# Altium PCB БНРД.xxxxxx.xxx.PcbDoc
Units mm, origin at the board's own origin, x right, y up, seen from the top; angles counter-clockwise.
Board outline 230.5 x 108.5 mm, 2 copper layers (Top Layer, Bottom Layer), stack 1.57 mm thick; 70 components, 62 nets, 225 pads, 0 vias.
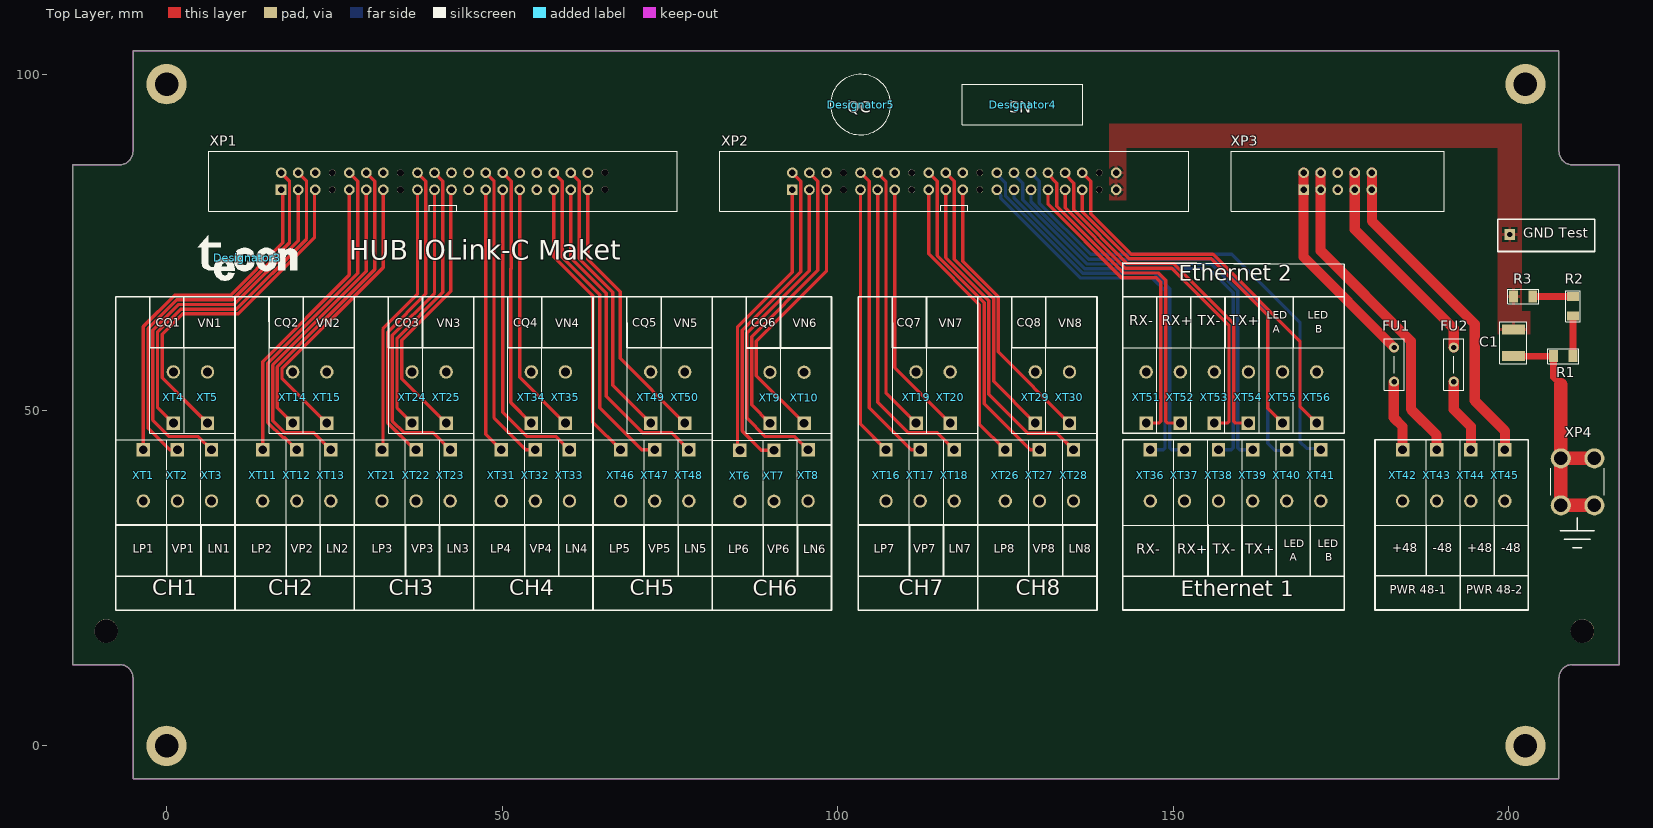
[diagram p0: Top Layer view]
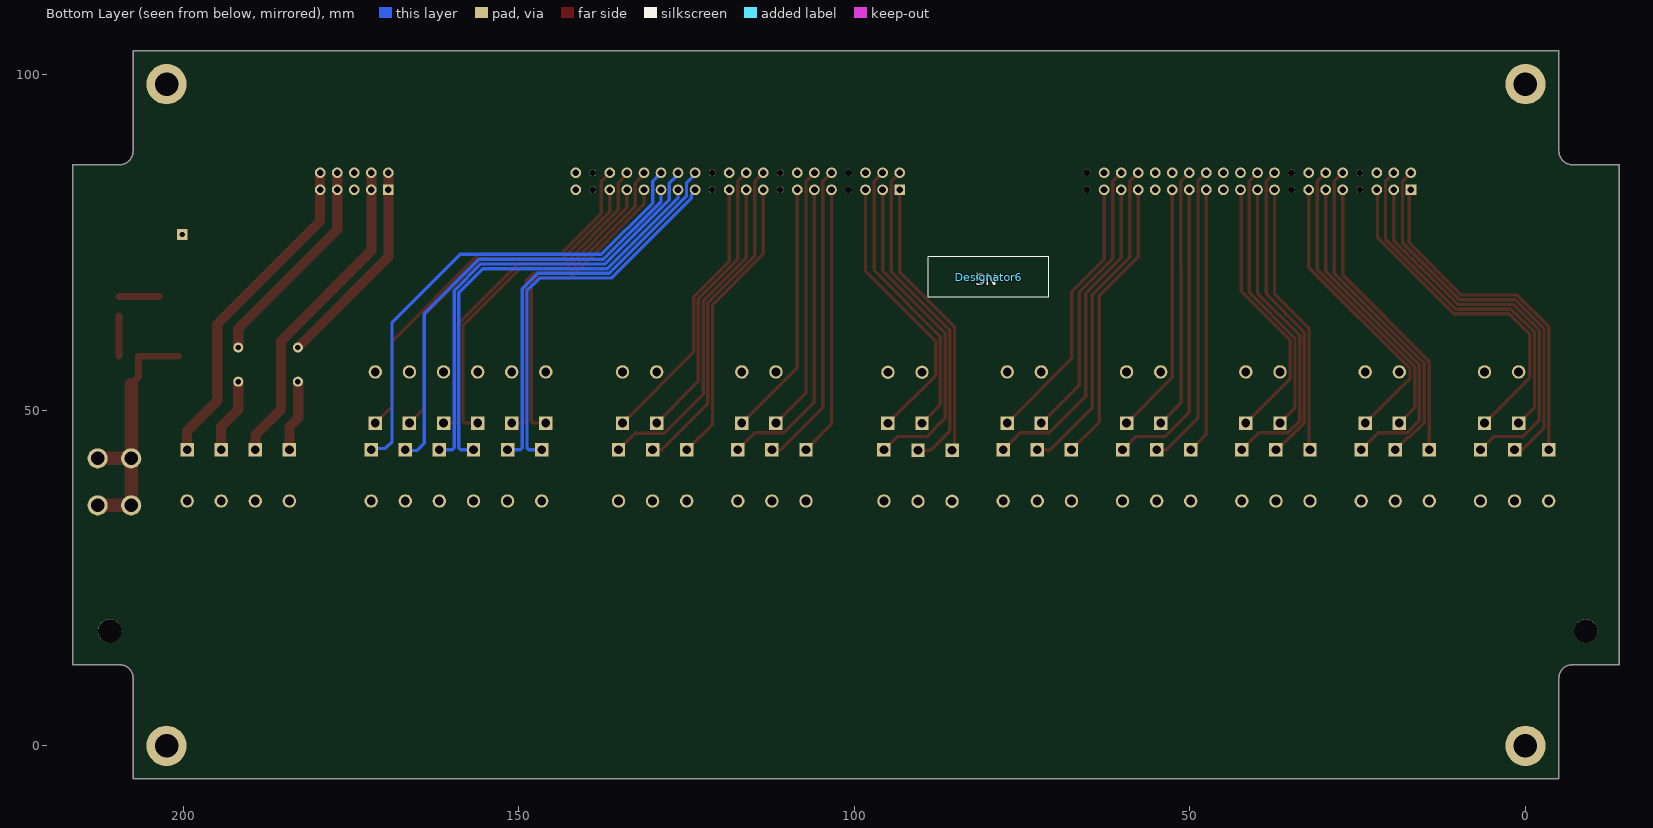
[diagram p1: Bottom Layer view, seen from below]
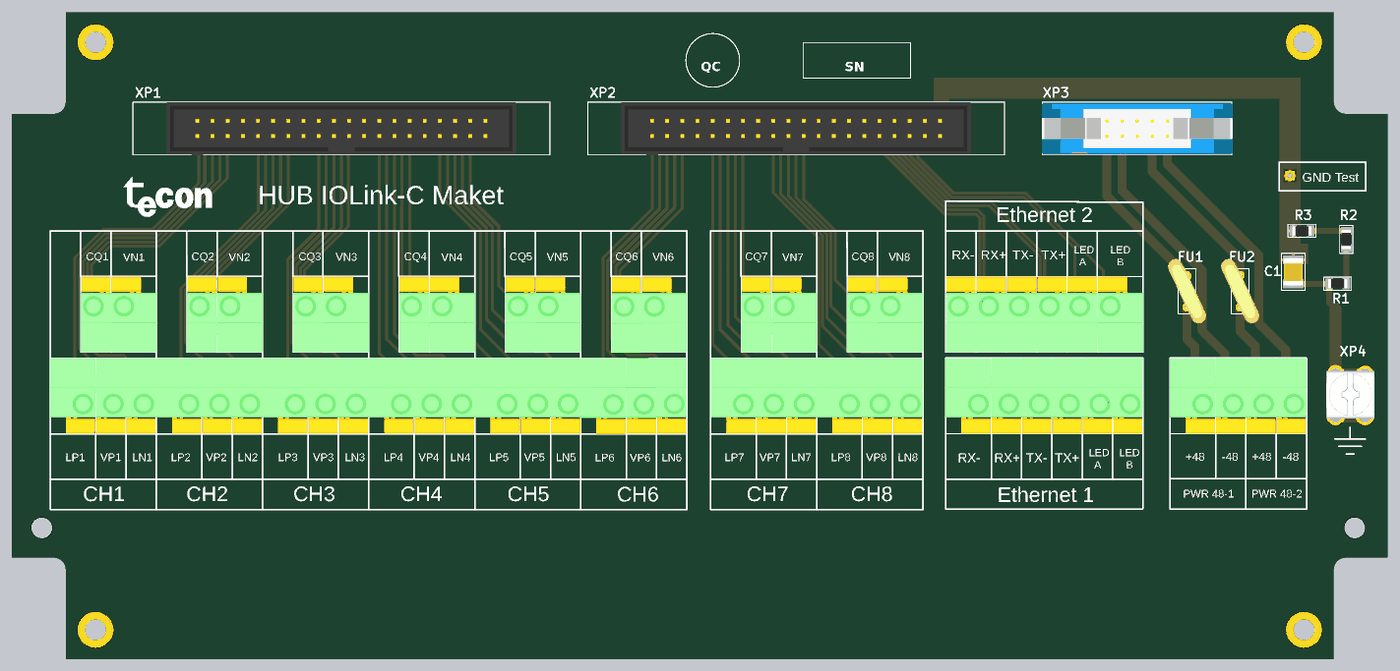
[diagram p2: 3D render of the assembled board from above, using the file's embedded part models]

## Layer stack, top to bottom
Top Solder: solder mask 0.015, Solder Resist, Dk 3.5
Top Layer: signal copper 0.018
Dielectric 1: dielectric 1.534, FR-4, Dk 4.8
Bottom Layer: signal copper 0.018
Bottom Solder: solder mask 0.015, Solder Resist, Dk 3.5

## Board outline
-5,-4.9 -5,10.1 ccw(c-7,10.1) -7,12.1 -14,12.1 -14,86.6 -7,86.6 ccw(c-7,88.6) -5,88.6 -5,103.6 207.5,103.6 207.5,88.6 ccw(c209.5,88.6) 209.5,86.6 216.5,86.6 216.5,12.1 209.5,12.1 ccw(c209.5,10.1) 207.5,10.1 207.5,-4.9

## Design rules (kind name [scope] priority, off if disabled: settings)
Clearance PWR2 [InNetClass('48V_2') vs InNetClass('48V_1')Or InNetClass('Ground')] p1: gap=2.5 ignorepadtopadclearanceinfootprint=FALSE except(0: Arc-Hole Track-Hole SMDPad-Hole THPad-Hole Via-Hole Fill-Hole Poly-Hole Region-Hole Text-Hole)
Clearance PWR1 [InNetClass('48V_1') vs InNetClass('48V_2')Or InNetClass('Ground')] p2: gap=2.5 ignorepadtopadclearanceinfootprint=FALSE except(0: Arc-Hole Track-Hole SMDPad-Hole THPad-Hole Via-Hole Fill-Hole Poly-Hole Region-Hole Text-Hole)
Clearance GND_1/3 [InNet('GND') vs InNet('NetR2_2')] p3: gap=0.84 ignorepadtopadclearanceinfootprint=FALSE except(0: Arc-Hole Track-Hole SMDPad-Hole THPad-Hole Via-Hole Fill-Hole Poly-Hole Region-Hole Text-Hole)
Clearance GND_ETH [InNetClass('Ground') vs InNetClass('ETH2')] p4: gap=2.5 ignorepadtopadclearanceinfootprint=FALSE except(0: Arc-Hole Track-Hole SMDPad-Hole THPad-Hole Via-Hole Fill-Hole Poly-Hole Region-Hole Text-Hole)
Clearance GND_GNDZ [InNet('GND') vs InNet('GNDZ')] p5: gap=2.5 ignorepadtopadclearanceinfootprint=FALSE except(0: Arc-Hole Track-Hole SMDPad-Hole THPad-Hole Via-Hole Fill-Hole Poly-Hole Region-Hole Text-Hole)
Clearance "Clearance PWR" [InNetClass('48V_1')OR InNetClass('48V_2') vs (InNetClass('ETH1') OR InNetClass('ETH2'))] p6: gap=2.5 ignorepadtopadclearanceinfootprint=FALSE except(0: Arc-Hole Track-Hole SMDPad-Hole THPad-Hole Via-Hole Fill-Hole Poly-Hole Region-Hole Text-Hole)
Clearance IsKeepOut [IsKeepOut] p7: gap=0.5 ignorepadtopadclearanceinfootprint=FALSE except(0: Arc-Hole Track-Hole SMDPad-Hole THPad-Hole Via-Hole Fill-Hole Poly-Hole Region-Hole Text-Hole)
Clearance "Clearance CH1" [InNetClass('CH1') vs (InNetClass('CH2') OR InNetClass('CH3') OR InNetClass('CH4') OR InNetClass('CH5') OR InNetClass('CH6') OR InNetClass('CH7') OR InNetClass('CH8') OR InNetClass('ETH1') OR InNetClass('ETH2'))] p8: gap=2.5 ignorepadtopadclearanceinfootprint=FALSE except(0: Arc-Hole Track-Hole SMDPad-Hole THPad-Hole Via-Hole Fill-Hole Poly-Hole Region-Hole Text-Hole)
Clearance "Clearance CH2" [InNetClass('CH2') vs (InNetClass('CH1') OR InNetClass('CH3') OR InNetClass('CH4') OR InNetClass('CH5') OR InNetClass('CH6') OR InNetClass('CH7') OR InNetClass('CH8') OR InNetClass('ETH1') OR InNetClass('ETH2'))] p9: gap=2.5 ignorepadtopadclearanceinfootprint=FALSE except(0: Arc-Hole Track-Hole SMDPad-Hole THPad-Hole Via-Hole Fill-Hole Poly-Hole Region-Hole Text-Hole)
Clearance "Clearance CH3" [InNetClass('CH3') vs (InNetClass('CH1') OR InNetClass('CH2') OR InNetClass('CH4') OR InNetClass('CH5') OR InNetClass('CH6') OR InNetClass('CH7') OR InNetClass('CH8') OR InNetClass('ETH1') OR InNetClass('ETH2'))] p10: gap=2.5 ignorepadtopadclearanceinfootprint=FALSE except(0: Arc-Hole Track-Hole SMDPad-Hole THPad-Hole Via-Hole Fill-Hole Poly-Hole Region-Hole Text-Hole)
Clearance "Clearance CH4" [InNetClass('CH4') vs (InNetClass('CH1') OR InNetClass('CH3') OR InNetClass('CH2') OR InNetClass('CH5') OR InNetClass('CH6') OR InNetClass('CH7') OR InNetClass('CH8') OR InNetClass('ETH1') OR InNetClass('ETH2'))] p11: gap=2.5 ignorepadtopadclearanceinfootprint=FALSE except(0: Arc-Hole Track-Hole SMDPad-Hole THPad-Hole Via-Hole Fill-Hole Poly-Hole Region-Hole Text-Hole)
Clearance "Clearance CH5" [InNetClass('CH5') vs (InNetClass('CH1') OR InNetClass('CH3') OR InNetClass('CH2') OR InNetClass('CH4') OR InNetClass('CH6') OR InNetClass('CH7') OR InNetClass('CH8') OR InNetClass('ETH1') OR InNetClass('ETH2'))] p12: gap=2.5 ignorepadtopadclearanceinfootprint=FALSE except(0: Arc-Hole Track-Hole SMDPad-Hole THPad-Hole Via-Hole Fill-Hole Poly-Hole Region-Hole Text-Hole)
Clearance "Clearance CH6" [InNetClass('CH6') vs (InNetClass('CH1') OR InNetClass('CH3') OR InNetClass('CH2') OR InNetClass('CH4') OR InNetClass('CH5') OR InNetClass('CH7') OR InNetClass('CH8') OR InNetClass('ETH1') OR InNetClass('ETH2'))] p13: gap=2.5 ignorepadtopadclearanceinfootprint=FALSE except(0: Arc-Hole Track-Hole SMDPad-Hole THPad-Hole Via-Hole Fill-Hole Poly-Hole Region-Hole Text-Hole)
Clearance "Clearance CH7" [InNetClass('CH7') vs (InNetClass('CH1') OR InNetClass('CH3') OR InNetClass('CH2') OR InNetClass('CH4') OR InNetClass('CH5') OR InNetClass('CH6') OR InNetClass('CH8') OR InNetClass('ETH1') OR InNetClass('ETH2'))] p14: gap=2.5 ignorepadtopadclearanceinfootprint=FALSE except(0: Arc-Hole Track-Hole SMDPad-Hole THPad-Hole Via-Hole Fill-Hole Poly-Hole Region-Hole Text-Hole)
Clearance "Clearance CH8" [InNetClass('CH8') vs (InNetClass('CH1') OR InNetClass('CH3') OR InNetClass('CH2') OR InNetClass('CH4') OR InNetClass('CH5') OR InNetClass('CH7') OR InNetClass('CH6') OR InNetClass('ETH1') OR InNetClass('ETH2'))] p15: gap=2.5 ignorepadtopadclearanceinfootprint=FALSE except(0: Arc-Hole Track-Hole SMDPad-Hole THPad-Hole Via-Hole Fill-Hole Poly-Hole Region-Hole Text-Hole)
Clearance [All] p16: gap=0.2 ignorepadtopadclearanceinfootprint=FALSE except(0: Arc-Hole Track-Hole SMDPad-Hole THPad-Hole Via-Hole Fill-Hole Poly-Hole Region-Hole Text-Hole)
ComponentClearance [All] p1: gap=-0.254 collisioncheckmode=3 verticalgap=0.254 showdistances=FALSE
DiffPairsRouting [All] p1: maxlimit=0.2 minlimit=0.2 mostfreqgap=0.2 toplayer_minwidth=0.5 toplayer_maxwidth=0.5 toplayer_prefwidth=0.5 bottomlayer_minwidth=0.5 bottomlayer_maxwidth=0.5 bottomlayer_prefwidth=0.5 maxuncoupledlength=12.7
Height [All] p1: minheight=0 maxheight=100 prefheight=12.7
PolygonConnect [All] p1: connectstyle=Relief reliefconductorwidth=0.5 reliefentries=4 polygonreliefangle="90 Angle" airgapwidth=0.3
RoutingVias [All] p1: holewidth=0.4 width=0.8 viastyle="Through Hole" minholewidth=0.3 minwidth=0.7 maxholewidth=0.4 maxwidth=1
SMDEntry [All] p1: side=TRUE corner=FALSE anyangle=FALSE
SolderMaskExpansion [All] p1: expansion=0.102
Width Ground [InNetClass('Ground')] p1: maxlimit=2 minlimit=1 preferedwidth=1.5 minimp=50.000000 maximp=50.000000 favimp=50.000000
Width PWR [InNetClass('48V_1')OR InNetClass('48V_2')OR InNetClass('24V')] p2: maxlimit=2 minlimit=1 preferedwidth=1.5 minimp=50.000000 maximp=50.000000 favimp=50.000000
Width [All] p3: maxlimit=0.5 minlimit=0.3 preferedwidth=0.5 minimp=50.000000 maximp=50.000000 favimp=50.000000
27 further rules are at their usual default settings.

## Classes and differential pairs
net class 48V_1: +48V_1 -48V_1 NetFU1_2
net class Ground: GND GNDZ NetR1_2 NetR2_2
net class 48V_2: +48V_2 -48V_2 NetFU2_2
net class ETH2: E2_LEDA E2_LEDB E2_RX_N E2_RX_P E2_TX_N E2_TX_P NetXT49_1 NetXT50_1 NetXT51_1 NetXT52_1 NetXT53_1 NetXT54_1 NetXT55_1 NetXT56_1
net class ETH1: E1_LEDA E1_LEDB E1_RX_N E1_RX_P E1_TX_N E1_TX_P NetXT36_1 NetXT37_1 NetXT38_1 NetXT39_1 NetXT40_1 NetXT41_1 NetXT42_1 NetXT43_1
net class CH8: CQ8 LN8 LP8 VN8 VP8
net class CH7: CQ7 LN7 LP7 VN7 VP7
net class CH6: CQ6 LN6 LP6 VN6 VP6
net class CH5: CQ5 LN5 LP5 VN5 VP5
net class CH4: CQ4 LN4 LP4 VN4 VP4
net class CH3: CQ3 LN3 LP3 VN3 VP3
net class CH2: CQ2 LN2 LP2 VN2 VP2
net class CH1: CQ1 LN1 LP1 VN1 VP1
component class Channels: C1 FU1 FU2 R1 R2 R3 XP1 XP2 XP3 XP4 XT1 XT2 XT3 XT4 XT5 XT6 XT7 XT8 XT9 XT10 XT11 XT12 XT13 XT14 XT15 XT16 XT17 XT18 XT19 XT20 XT21 XT22 XT23 XT24 XT25 XT26 XT27 XT28 XT29 XT30 XT31 XT32 XT33 XT34 XT35 XT36 XT37 XT38 XT39 XT40 XT41 XT42 XT43 XT44 XT45 XT46 XT47 XT48 XT49 XT51 XT52 XT56
differential pair E2_TX: +E2_TX_P -E2_TX_N
differential pair E2_RX: +E2_RX_P -E2_RX_N
differential pair E1_TX: +E1_TX_P -E1_TX_N
differential pair E1_RX: +E1_RX_P -E1_RX_N

## Components (designator, comment, footprint, x,y, rotation, side; value= is the part's Value field where it differs from the comment)
C1 "C1812" 1812 200.706,58.07 r90 top value="470 п"
Designator3 "Comment" LOGO_TECON 11.99,72.7 r0 top
Designator4 "Comment" LABEL_SN 127.56,95.56 r0 top
Designator5 "Comment" LABEL_QC(OTK) 103.43,95.56 r0 top
Designator6 "Comment" LABEL_SN 80.01,69.85 r180 bottom
FU1 "MF-R090" MF-R090 182.926,59.36 r270 top
FU2 "MF-R090" MF-R090 191.816,59.36 r270 top
R1 "R1206" 1206 206.696,58.07 r0 top value="8.2 М"
R2 "R1206" 1206 209.596,64.06 r90 top value="8.2 М"
R3 "R1206" 1206 203.606,66.96 r180 top value="8.2 М"
XP1 "SCM-40" SCM-40#1 17.07,82.86 r180 top
XP2 "SCM-40" SCM-40#2 93.259,82.86 r180 top
XP3 "SCM-10" SCM-10 169.448,82.86 r180 top
XP4 "Keystone 7693" "KEYSTONE 7693" 207.771,42.83 r0 top
XT1 "FFKDSA1/V1-7,62-1790490" FFKDSA1/V1-7,62-1790490 -3.46,44.1 r180 top
XT2 "FFKDS/V1-5,08-1790319" FFKDS/V1-5,08-1790319 1.62,44.1 r180 top
XT3 "FFKDS/V1-5,08-1790319" FFKDS/V1-5,08-1790319 6.7,44.1 r180 top
XT4 "FFKDS/V1-5,08-1790319" FFKDS/V1-5,08-1790319 1.02,48.1 r0 top
XT5 "FFKDSA1/V1-7,62-1790490" FFKDSA1/V1-7,62-1790490 6.1,48.1 r0 top
XT6 "FFKDSA1/V1-7,62-1790490" FFKDSA1/V1-7,62-1790490 85.44,44.051 r180 top
XT7 "FFKDS/V1-5,08-1790319" FFKDS/V1-5,08-1790319 90.52,44.051 r180 top
XT8 "FFKDS/V1-5,08-1790319" FFKDS/V1-5,08-1790319 95.6,44.1 r180 top
XT9 "FFKDS/V1-5,08-1790319" FFKDS/V1-5,08-1790319 89.92,48.051 r0 top
XT10 "FFKDSA1/V1-7,62-1790490" FFKDSA1/V1-7,62-1790490 95,48.051 r0 top
XT11 "FFKDSA1/V1-7,62-1790490" FFKDSA1/V1-7,62-1790490 14.32,44.1 r180 top
XT12 "FFKDS/V1-5,08-1790319" FFKDS/V1-5,08-1790319 19.4,44.1 r180 top
XT13 "FFKDS/V1-5,08-1790319" FFKDS/V1-5,08-1790319 24.48,44.1 r180 top
XT14 "FFKDS/V1-5,08-1790319" FFKDS/V1-5,08-1790319 18.8,48.1 r0 top
XT15 "FFKDSA1/V1-7,62-1790490" FFKDSA1/V1-7,62-1790490 23.88,48.1 r0 top
XT16 "FFKDSA1/V1-7,62-1790490" FFKDSA1/V1-7,62-1790490 107.212,44.1 r180 top
XT17 "FFKDS/V1-5,08-1790319" FFKDS/V1-5,08-1790319 112.292,44.1 r180 top
XT18 "FFKDS/V1-5,08-1790319" FFKDS/V1-5,08-1790319 117.372,44.1 r180 top
XT19 "FFKDS/V1-5,08-1790319" FFKDS/V1-5,08-1790319 111.692,48.1 r0 top
XT20 "FFKDSA1/V1-7,62-1790490" FFKDSA1/V1-7,62-1790490 116.772,48.1 r0 top
XT21 "FFKDSA1/V1-7,62-1790490" FFKDSA1/V1-7,62-1790490 32.1,44.1 r180 top
XT22 "FFKDS/V1-5,08-1790319" FFKDS/V1-5,08-1790319 37.18,44.1 r180 top
XT23 "FFKDS/V1-5,08-1790319" FFKDS/V1-5,08-1790319 42.26,44.1 r180 top
XT24 "FFKDS/V1-5,08-1790319" FFKDS/V1-5,08-1790319 36.58,48.1 r0 top
XT25 "FFKDSA1/V1-7,62-1790490" FFKDSA1/V1-7,62-1790490 41.66,48.1 r0 top
XT26 "FFKDSA1/V1-7,62-1790490" FFKDSA1/V1-7,62-1790490 124.992,44.1 r180 top
XT27 "FFKDS/V1-5,08-1790319" FFKDS/V1-5,08-1790319 130.072,44.1 r180 top
XT28 "FFKDS/V1-5,08-1790319" FFKDS/V1-5,08-1790319 135.152,44.1 r180 top
XT29 "FFKDS/V1-5,08-1790319" FFKDS/V1-5,08-1790319 129.472,48.1 r0 top
XT30 "FFKDSA1/V1-7,62-1790490" FFKDSA1/V1-7,62-1790490 134.552,48.1 r0 top
XT31 "FFKDSA1/V1-7,62-1790490" FFKDSA1/V1-7,62-1790490 49.88,44.1 r180 top
XT32 "FFKDS/V1-5,08-1790319" FFKDS/V1-5,08-1790319 54.96,44.1 r180 top
XT33 "FFKDS/V1-5,08-1790319" FFKDS/V1-5,08-1790319 60.04,44.1 r180 top
XT34 "FFKDS/V1-5,08-1790319" FFKDS/V1-5,08-1790319 54.36,48.1 r0 top
XT35 "FFKDSA1/V1-7,62-1790490" FFKDSA1/V1-7,62-1790490 59.44,48.1 r0 top
XT36 "FFKDSA1/V1-7,62-1790490" FFKDSA1/V1-7,62-1790490 146.604,44.1 r180 top
XT37 "FFKDS/V1-5,08-1790319" FFKDS/V1-5,08-1790319 151.684,44.1 r180 top
XT38 "FFKDS/V1-5,08-1790319" FFKDS/V1-5,08-1790319 156.764,44.1 r180 top
XT39 "FFKDS/V1-5,08-1790319" FFKDS/V1-5,08-1790319 161.844,44.1 r180 top
XT40 "FFKDS/V1-5,08-1790319" FFKDS/V1-5,08-1790319 166.924,44.1 r180 top
XT41 "FFKDS/V1-5,08-1790319" FFKDS/V1-5,08-1790319 172.004,44.1 r180 top
XT42 "FFKDSA1/V1-7,62-1790490" FFKDSA1/V1-7,62-1790490 184.196,44.1 r180 top
XT43 "FFKDS/V1-5,08-1790319" FFKDS/V1-5,08-1790319 189.276,44.1 r180 top
XT44 "FFKDS/V1-5,08-1790319" FFKDS/V1-5,08-1790319 194.356,44.1 r180 top
XT45 "FFKDS/V1-5,08-1790319" FFKDS/V1-5,08-1790319 199.436,44.1 r180 top
XT46 "FFKDSA1/V1-7,62-1790490" FFKDSA1/V1-7,62-1790490 67.66,44.1 r180 top
XT47 "FFKDS/V1-5,08-1790319" FFKDS/V1-5,08-1790319 72.74,44.1 r180 top
XT48 "FFKDS/V1-5,08-1790319" FFKDS/V1-5,08-1790319 77.82,44.1 r180 top
XT49 "FFKDS/V1-5,08-1790319" FFKDS/V1-5,08-1790319 72.14,48.1 r0 top
XT50 "FFKDSA1/V1-7,62-1790490" FFKDSA1/V1-7,62-1790490 77.22,48.1 r0 top
XT51 "FFKDS/V1-5,08-1790319" FFKDS/V1-5,08-1790319 145.984,48.1 r0 top
XT52 "FFKDS/V1-5,08-1790319" FFKDS/V1-5,08-1790319 151.064,48.1 r0 top
XT53 "FFKDS/V1-5,08-1790319" FFKDS/V1-5,08-1790319 156.144,48.1 r0 top
XT54 "FFKDS/V1-5,08-1790319" FFKDS/V1-5,08-1790319 161.224,48.1 r0 top
XT55 "FFKDS/V1-5,08-1790319" FFKDS/V1-5,08-1790319 166.304,48.1 r0 top
XT56 "FFKDSA1/V1-7,62-1790490" FFKDSA1/V1-7,62-1790490 171.384,48.1 r0 top

## Footprints (in the part's own frame and the unit in brackets; to place one, negate y for a bottom-side part, rotate by r counter-clockwise, add the part's x,y. Pads: shape width x height; smd on the part's side, far side on the other; paste and mask are expansions set on the pad)
1206 [mm]
  rect 1.3x1.8 smd: 1(0,0) 2(2.9,0)
  silkscreen extent -0.87,-1.1 3.77,1.1, body extent -0.15,-0.76 3.05,0.84, height 0.6
1812 [mm]
  rect 1.5x3.4 smd: 1(0,0) 2(4,0)
  silkscreen extent -1.1,-2 5.1,2, body extent -0.45,-1.61 4.47,1.61, height 3.21
FFKDS/V1-5,08-1790319 [mm]
  rect 2x2 hole 1.3: 1(0,0)
  round 2 hole 1.3: 2(0,7.62)
  silkscreen extent -3.5,-1.5 2.85,11.2, body extent -3.5,-1.52 3.38,11.18, height 13.79
FFKDSA1/V1-7,62-1790490 [mm]
  rect 2x2 hole 1.3: 1(0,0)
  round 2 hole 1.3: 2(0,7.62)
  silkscreen extent -3.5,-1.5 4.12,11.2, body extent -3.48,-1.5 4.14,11.2, height 13.85
"KEYSTONE 7693" [mm]
  round 3 hole 2: 1(0,0) 2(5,0) 3(0,-7) 4(5,-7)
  silkscreen extent -1.5,-5.5 6.5,-1.5, body extent -1.48,-7.94 6.52,1.18, height 8.16
LABEL_QC(OTK) [mm]
  silkscreen extent -4.5,-4.5 4.5,4.5
LABEL_SN [mm]
  silkscreen extent -9,-3 9,3
LOGO_TECON [mm]
  silkscreen extent -7.35,-3.4 7.5,3.4
MF-R090 [mm]
  round 1.5 hole 0.8: 1(0,0) 2(5.1,0)
  silkscreen extent -1.27,-1.5 6.35,1.5, body extent -3.42,-3.88 8.5,3.88, height 15.55
SCM-10 [mm]
  rect 1.6x1.6 hole 1: 1(0,0)
  round 1.6 hole 1: 2(0,-2.54) 3(-2.54,0) 4(-2.54,-2.54) 5(-5.08,0) 6(-5.08,-2.54) 7(-7.62,0) 8(-7.62,-2.54) 9(-10.16,0) 10(-10.16,-2.54)
  silkscreen extent -20.95,-5.72 10.79,3.18, body extent -21.11,-5.44 10.89,2.95, height 26.38
SCM-40#1 [mm]
  rect 1.6x1.6 hole 1: 1(0,0)
  round 1.6 hole 1: 2(0,-2.54) 3(-2.54,0) 4(-2.54,-2.54) 5(-5.08,0) 6(-5.08,-2.54) 9(-10.16,0) 10(-10.16,-2.54) 11(-12.7,0) 12(-12.7,-2.54) 13(-15.24,0) 14(-15.24,-2.54) 17(-20.32,0) 18(-20.32,-2.54) 19(-22.86,0) 20(-22.86,-2.54) 21(-25.4,0) 22(-25.4,-2.54) 23(-27.94,0) 24(-27.94,-2.54) 25(-30.48,0) 26(-30.48,-2.54) 27(-33.02,0) 28(-33.02,-2.54) 29(-35.56,0) 30(-35.56,-2.54) 31(-38.1,0) 32(-38.1,-2.54) 33(-40.64,0) 34(-40.64,-2.54) 35(-43.18,0) 36(-43.18,-2.54) 37(-45.72,0) 38(-45.72,-2.54)
  round 1 hole 1 unplated: 7(-7.62,0) 8(-7.62,-2.54) 15(-17.78,0) 16(-17.78,-2.54) 39(-48.26,0) 40(-48.26,-2.54)
  silkscreen extent -59.05,-5.72 10.79,3.18, body extent -53.43,-5.67 5.17,3.23, height 9
SCM-40#2 [mm]
  rect 1.6x1.6 hole 1: 1(0,0)
  round 1.6 hole 1: 2(0,-2.54) 3(-2.54,0) 4(-2.54,-2.54) 5(-5.08,0) 6(-5.08,-2.54) 9(-10.16,0) 10(-10.16,-2.54) 11(-12.7,0) 12(-12.7,-2.54) 13(-15.24,0) 14(-15.24,-2.54) 17(-20.32,0) 18(-20.32,-2.54) 19(-22.86,0) 20(-22.86,-2.54) 21(-25.4,0) 22(-25.4,-2.54) 25(-30.48,0) 26(-30.48,-2.54) 27(-33.02,0) 28(-33.02,-2.54) 29(-35.56,0) 30(-35.56,-2.54) 31(-38.1,0) 32(-38.1,-2.54) 33(-40.64,0) 34(-40.64,-2.54) 35(-43.18,0) 36(-43.18,-2.54) 39(-48.26,0) 40(-48.26,-2.54)
  round 1 hole 1 unplated: 7(-7.62,0) 8(-7.62,-2.54) 15(-17.78,0) 16(-17.78,-2.54) 23(-27.94,0) 24(-27.94,-2.54) 37(-45.72,0) 38(-45.72,-2.54)
  silkscreen extent -59.05,-5.72 10.79,3.18, body extent -53.43,-5.67 5.17,3.23, height 9

## Part data
C1: Package=1812, Tolerance="± 10 %", Voltage="3 кВ", DesCommon="470 пФ ± 10 % - 3 кВ - X7R - 1812", TechSpec=X7R, Units=Ф
R1 R2 R3: Package=1206, Power="0,25 Вт", Tolerance="± 5 %", DesCommon="8.2 МОм ± 5 % - 0,25 Вт - 1206", Units=Ом
XP4: library part "KEYSTONE 7693", DesCommon="Контакт заземления  Keystone 7693"
FU1 FU2: DesCommon="Предохранитель  MF-R090 Bourns"
XP1 XP2: DesCommon="Вилка SCM-40 «Бурый медведь»"
XP3: DesCommon="Вилка SCM-10 «Бурый медведь»"
XT1 XT5 XT6 XT10 XT11 XT15 XT16 XT20 XT21 XT25 XT26 XT30 XT31 XT35 XT36 XT42 XT46 XT50 XT56: DesCommon="Клемма FFKDSA1/V1-7,62-1790490 Phoenix Contact"
XT2 XT3 XT4 XT7 XT8 XT9 XT12 XT13 XT14 XT17 XT18 XT19 XT22 XT23 XT24 XT27 XT28 XT29 XT32 XT33 XT34 XT37 XT38 XT39 XT40 XT41 XT43 XT44 XT45 XT47 XT48 XT49 XT51 XT52 XT53 XT54 XT55: DesCommon="Клемма FFKDS/V1-5,08-1790319 Phoenix Contact"

## Free pads (board coordinates)
  round 6 hole 3.5: 1(0,0) 1(0,98.6) 1(202.5,0) 1(202.5,98.6)
  round 3.5 hole 3.5 unplated: 3(-9,17.1) 4(211,17.1)
  rect 1.6x1.6 hole 0.8 unplated: 5(200.152,76.2)

## Nets (pads, with @x,y where several pads share a name; then routed paths per layer and width w, separated by ;. In a path a pad name is that pad's centre, name@x,y a point inside that pad or via, vN(x,y) a via of type N, cw(c..) or ccw(c..) an arc to the next point about the centre after c; other vN are vias at no path point)
+48V_1: FU1.1 XP3.1 XP3.2 | length 31.6
  Top Layer w1.5: XP3.2 XP3.1 169.448,72.838 FU1.1
+48V_2: FU2.1 XP3.7 XP3.8 | length 32.1
  Top Layer w1.5: XP3.8 XP3.7 177.068,76.932 191.816,62.184 FU2.1
-48V_1: XP3.3 XP3.4 XT43.1 | length 48.5
  Top Layer w1.5: XP3.4 XP3.3 171.988,73.757 185.42,60.325 185.42,50.165 189.276,46.309 XT43.1
-48V_2: XP3.9 XP3.10 XT45.1 | length 49.5
  Top Layer w1.5: XP3.10 XP3.9 179.608,78.202 194.945,62.865 194.945,51.435 199.436,46.944 XT45.1
CQ1: XP1.4 XT4.1 | length 52.9
  Top Layer w0.5: XT4.1 -1.36,50.48 -1.36,61.619 2.095,65.074 10.408,65.074 20.86,75.527 20.86,84.15 XP1.4
CQ2: XP1.12 XT14.1 | length 44.8
  Top Layer w0.5: XT14.1 16.502,50.398 16.502,56.462 31.02,70.981 31.02,84.15 XP1.12
CQ3: XP1.20 XT24.1 | length 41.6
  Top Layer w0.5: XT24.1 34.348,50.332 34.348,60.728 41.18,67.561 41.18,84.15 XP1.20
CQ4: XP1.28 XT34.1 | length 39.1
  Top Layer w0.5: XP1.28 51.34,84.15 51.34,71.113 51.298,71.071 51.298,51.162 XT34.1
CQ5: XP1.36 XT49.1 | length 42.2
  Top Layer w0.5: XP1.36 61.5,84.15 61.5,72.618 66.515,67.604 66.515,53.725 XT49.1
CQ6: XP2.4 XT9.1 | length 43.1
  Top Layer w0.5: XT9.1 87.18,50.791 87.18,60.993 97.049,70.862 97.049,84.15 XP2.4
CQ7: XP2.12 XT19.1 | length 39.7
  Top Layer w0.5: XP2.12 107.209,84.15 107.209,52.583 XT19.1
CQ8: XP2.20 XT29.1 | length 42.8
  Top Layer w0.5: XP2.20 117.389,84.13 117.389,72.483 123.242,66.63 123.242,54.33 XT29.1
E1_LEDA: XP2.29 XT40.1 | length 66.6
  Bottom Layer w0.5: XP2.29 128.819,81.093 137.404,72.508 155.946,72.508 164.074,64.38 164.074,45.076 165.137,44.013 166.837,44.013 XT40.1
E1_LEDB: XP2.30 XT41.1 | length 72.6
  Bottom Layer w0.5: XP2.30 130.069,84.15 130.069,80.888 137.687,73.27 158.74,73.27 168.9,63.11 168.9,45.33 169.916,44.314 171.79,44.314 XT41.1
E1_RX_N: XP2.25 XT36.1 | length 57.4
  Bottom Layer w0.5: XP2.25 123.739,82.607 124.329,82.017 124.329,81.623 136.244,69.708 146.886,69.708 148.794,67.8 148.794,44.393 148.501,44.1 XT36.1
E1_RX_P: XP2.26 XT37.1 | length 60.2
  Bottom Layer w0.5: XP2.26 123.739,85.143 125.029,83.853 125.029,81.913 136.534,70.408 147.176,70.408 149.494,68.09 149.494,44.393 149.787,44.1 XT37.1
E1_TX_N: XP2.27 XT38.1 | length 65.2
  Bottom Layer w0.5: XP2.27 126.279,81.653 136.824,71.108 155.366,71.108 158.954,67.52 158.954,44.393 158.661,44.1 XT38.1
E1_TX_P: XP2.28 XT39.1 | length 68
  Bottom Layer w0.5: XP2.28 126.279,85.143 127.569,83.853 127.569,81.353 137.114,71.808 155.656,71.808 159.654,67.81 159.654,44.393 159.947,44.1 XT39.1
E2_LEDA: XP2.35 XT55.1 | length 54.3
  Top Layer w0.5: XP2.35 136.439,79.595 143.464,72.57 155.656,72.57 164.074,64.152 164.074,50.33 XT55.1
E2_LEDB: XP2.36 XT56.1 | length 58.9
  Top Layer w0.5: XP2.36 137.729,84.11 137.729,79.295 143.754,73.27 155.946,73.27 168.9,60.316 168.9,50.584 XT56.1
E2_RX_N: XP2.31 XT51.1 | length 46.8
  Top Layer w0.5: XP2.31 131.359,80.715 142.304,69.77 147.492,69.77 148.174,69.088 148.174,48.393 147.881,48.1 XT51.1
E2_RX_P: XP2.32 XT52.1 | length 49.6
  Top Layer w0.5: XP2.32 131.359,85.143 132.649,83.853 132.649,80.415 142.594,70.47 147.782,70.47 148.874,69.378 148.874,48.393 149.167,48.1 XT52.1
E2_TX_N: XP2.33 XT53.1 | length 50.9
  Top Layer w0.5: XP2.33 133.899,80.155 142.884,71.17 149.788,71.17 158.334,62.624 158.334,48.393 158.041,48.1 XT53.1
E2_TX_P: XP2.34 XT54.1 | length 53.8
  Top Layer w0.5: XP2.34 133.899,85.143 135.189,83.853 135.189,79.855 143.174,71.87 150.077,71.87 159.034,62.914 159.034,48.393 159.327,48.1 XT54.1
GND: C1.2 pad.5 R3.2 XP2.39 XP2.40
GNDZ: C1.1 R1.1 XP4.1 XP4.2 XP4.3 XP4.4 | length 38.7
  Top Layer w1: C1.1 R1.1 206.696,54.924 207.771,53.849
  Top Layer w2: 207.771,53.849 XP4.1 ; XP4.4 XP4.3 XP4.1 ; XP4.2 XP4.1
LN1: XP1.3 XT3.1 | length 58.8
  Top Layer w0.5: XT3.1 4.708,46.092 0.392,46.092 -2.06,48.544 -2.06,61.908 1.806,65.774 10.118,65.774 19.61,75.266 XP1.3
LN2: XP1.11 XT13.1 | length 50.7
  Top Layer w0.5: XT13.1 21.93,46.65 17.614,46.65 15.802,48.462 15.802,56.752 29.77,70.72 XP1.11
LN3: XP1.19 XT23.1 | length 47.5
  Top Layer w0.5: XP1.19 39.93,67.474 33.648,61.192 33.648,48.396 35.394,46.65 39.71,46.65 XT23.1
LN4: XP1.27 XT33.1 | length 45.4
  Top Layer w0.5: XP1.27 50.09,49.734 53.732,46.092 58.048,46.092 XT33.1
LN5: XP1.35 XT48.1 | length 48.6
  Top Layer w0.5: XP1.35 60.25,72.7 65.522,67.428 65.522,52.082 70.954,46.65 75.27,46.65 XT48.1
LN6: XP2.3 XT8.1 | length 49
  Top Layer w0.5: XT8.1 93.608,46.092 89.242,46.092 86.48,48.855 86.48,61.462 95.799,70.781 XP2.3
LN7: XP2.11 XT18.1 | length 46
  Top Layer w0.5: XP2.11 105.959,51.197 110.506,46.65 114.822,46.65 XT18.1
LN8: XP2.19 XT28.1 | length 49.2
  Top Layer w0.5: XP2.19 116.119,72.763 122.542,66.34 122.542,52.394 128.343,46.593 132.659,46.593 XT28.1
LP1: XP1.1 XT1.1 | length 52.3
  Top Layer w0.5: XT1.1 -3.46,62.488 1.226,67.174 9.538,67.174 17.319,74.955 17.319,82.611 XP1.1
LP2: XP1.9 XT11.1 | length 44.1
  Top Layer w0.5: XT11.1 14.32,57.25 27.23,70.16 XP1.9
LP3: XP1.17 XT21.1 | length 41
  Top Layer w0.5: XT21.1 32.248,44.248 32.248,62.118 37.39,67.26 XP1.17
LP4: XP1.25 XT31.1 | length 39.7
  Top Layer w0.5: XP1.25 47.55,46.43 XT31.1
LP5: XP1.33 XT46.1 | length 42.9
  Top Layer w0.5: XP1.33 57.71,72.903 63.536,67.077 63.536,48.224 XT46.1
LP6: XP2.1 XT6.1 | length 42.4
  Top Layer w0.5: XT6.1 85.08,44.411 85.08,62.399 93.265,70.584 93.265,82.854 XP2.1
LP7: XP2.9 XT16.1 | length 40.3
  Top Layer w0.5: XP2.9 103.419,47.893 XT16.1
LP8: XP2.17 XT26.1 | length 43.5
  Top Layer w0.5: XP2.17 113.579,73.323 121.142,65.76 121.142,47.95 XT26.1
NetFU1_2: FU1.2 XT42.1 | length 10.7
  Top Layer w1.5: FU1.2 182.88,54.214 182.88,48.895 184.196,47.579 XT42.1
NetFU2_2: FU2.2 XT44.1 | length 11.2
  Top Layer w1.5: FU2.2 191.816,50.119 194.356,47.579 XT44.1
NetR1_2: R1.2 R2.1 | length 6
  Top Layer w1: R1.2 R2.1
NetR2_2: R2.2 R3.1 | length 6
  Top Layer w1: R3.1 R2.2
VN1: XP1.5 XT5.1 | length 51.9
  Top Layer w0.5: XT5.1 -0.66,54.86 -0.66,61.329 2.385,64.374 10.697,64.374 22.039,75.715 22.039,82.749 XP1.5
VN2: XP1.13 XT15.1 | length 43.8
  Top Layer w0.5: XT15.1 17.202,54.778 17.202,56.172 32.31,71.281 XP1.13
VN3: XP1.21 XT25.1 | length 40.6
  Top Layer w0.5: XT25.1 35.048,54.712 35.048,60.438 42.359,67.749 42.359,82.749 XP1.21
VN4: XP1.29 XT35.1 | length 37.6
  Top Layer w0.5: XP1.29 52.63,54.91 XT35.1
VN5: XP1.37 XT50.1 | length 40.7
  Top Layer w0.5: XP1.37 62.79,72.497 67.592,67.695 67.592,57.728 XT50.1
VN6: XP2.5 XT10.1 | length 42.1
  Top Layer w0.5: XT10.1 87.88,55.171 87.88,60.287 98.339,70.746 XP2.5
VN7: XP2.13 XT20.1 | length 38.2
  Top Layer w0.5: XP2.13 108.499,56.373 XT20.1
VN8: XP2.21 XT30.1 | length 41.3
  Top Layer w0.5: XP2.21 118.659,72.203 123.942,66.92 123.942,58.71 XT30.1
VP1: XP1.2 XT2.1 | length 57.9
  Top Layer w0.5: XT2.1 0.458,44.1 -2.76,47.318 -2.76,62.198 1.516,66.474 9.828,66.474 18.32,74.966 18.32,84.15 XP1.2
VP2: XP1.10 XT12.1 | length 49.3
  Top Layer w0.5: XT12.1 17.55,45.95 17.324,45.95 15.102,48.172 15.102,57.042 28.48,70.42 28.48,84.15 XP1.10
VP3: XP1.18 XT22.1 | length 46.1
  Top Layer w0.5: XT22.1 36.954,44.1 32.948,48.106 32.948,61.655 38.64,67.347 38.64,84.15 XP1.18
VP4: XP1.26 XT32.1 | length 45.2
  Top Layer w0.5: XP1.26 48.8,84.15 48.8,48.844 53.544,44.1 XT32.1
VP5: XP1.34 XT47.1 | length 48.7
  Top Layer w0.5: XP1.34 58.98,84.13 58.98,72.801 64.529,67.252 64.529,50.387 70.816,44.1 XT47.1
VP6: XP2.2 XT7.1 | length 48.5
  Top Layer w0.5: XT7.1 88.645,44.051 85.78,46.916 85.78,61.931 94.509,70.659 94.509,84.15 XP2.2
VP7: XP2.10 XT17.1 | length 45.8
  Top Layer w0.5: XP2.10 104.689,84.13 104.689,50.359 110.948,44.1 XT17.1
VP8: XP2.18 XT27.1 | length 48.9
  Top Layer w0.5: XP2.18 114.829,84.15 114.829,73.063 121.842,66.05 121.842,50.986 128.728,44.1 XT27.1
pads on no net: XP1.6 XP1.7 XP1.8 XP1.14 XP1.15 XP1.16 XP1.22 XP1.23 XP1.24 XP1.30 XP1.31 XP1.32 XP1.38 XP1.39 XP1.40 XP2.6 XP2.7 XP2.8 XP2.14 XP2.15 XP2.16 XP2.22 XP2.23 XP2.24 XP2.37 XP2.38 XP3.5 XP3.6 XT1.2 XT2.2 XT3.2 XT4.2 XT5.2 XT6.2 XT7.2 XT8.2 XT9.2 XT10.2 XT11.2 XT12.2 XT13.2 XT14.2 XT15.2 XT16.2 XT17.2 XT18.2 XT19.2 XT20.2 XT21.2 XT22.2 XT23.2 XT24.2 XT25.2 XT26.2 XT27.2 XT28.2 XT29.2 XT30.2 XT31.2 XT32.2 XT33.2 XT34.2 XT35.2 XT36.2 XT37.2 XT38.2 XT39.2 XT40.2 XT41.2 XT42.2 XT43.2 XT44.2 XT45.2 XT46.2 XT47.2 XT48.2 XT49.2 XT50.2 XT51.2 XT52.2 XT53.2 XT54.2 XT55.2 XT56.2

## Polygon pours and split planes (outlines as drawn)
no net on Bottom Layer "Bottom Layer-No Net" (solid, pour order 4): 140.462,81.28
GND on Top Layer "GND_L01_P006" (solid, remove dead copper, pour order 6): 140.462,81.28 140.462,92.71 201.93,92.71 201.93,64.77 203.2,64.77 203.2,60.96 198.374,60.96 198.374,89.154 143.002,89.154 143.002,81.28

## Keep-outs
Keep-Out Layer:
  lines w0.1: -14,12.1 -14,86.6 -7,86.6 ccw(c-7,88.6) -5,88.6 -5,103.6 207.5,103.6 207.5,88.6 ccw(c209.5,88.6) 209.5,86.6 216.5,86.6 216.5,12.1 209.5,12.1 ccw(c209.5,10.1) 207.5,10.1 207.5,-4.9 -5,-4.9 -5,10.1 ccw(c-7,10.1) -7,12.1 -14,12.1
  lines w0.127: -14,12.1 -14,86.6 -7,86.6 ccw(c-7,88.6) -5,88.6 -5,103.6 207.5,103.6 207.5,88.6 ccw(c209.5,88.6) 209.5,86.6 216.5,86.6 216.5,12.1 209.5,12.1 ccw(c209.5,10.1) 207.5,10.1 207.5,-4.9 -5,-4.9 -5,10.1 ccw(c-7,10.1) -7,12.1 -14,12.1

## Silkscreen, mask and mechanical layers (free items; w line width, h text height)
Top Overlay:
  drawing of 224 lines, arcs and shapes, not listed
  text "GND Test" at 202.184,75.184 h2.5
  text "HUB IOLink-C Maket" at 27.23,71.43 h5
  text "Ethernet 2" at 150.844,68.46 h4
  text "LED" at 163.927,63.172 h2
  text "LED" at 170.023,63.172 h2
  text "RX-" at 143.48,62.156 h2.5
  text "RX+" at 148.306,62.156 h2.5
  text "TX-" at 153.64,62.156 h2.5
  text "TX+" at 158.466,62.156 h2.5
  text "CQ1" at -1.611,62.017 h2.1
  text "CQ2" at 16.075,62.017 h2.1
  text "CQ3" at 34.015,62.017 h2.1
  text "CQ4" at 51.701,62.017 h2.1
  text "CQ5" at 69.387,62.017 h2.1
  text "CQ6" at 87.107,62.017 h2.1
  text "CQ7" at 108.831,62.017 h2.1
  text "CQ8" at 126.685,62.017 h2.1
  text "VN3" at 40.238,61.936 h2.1
  text "VN5" at 75.61,61.936 h2.1
  text "VN6" at 93.33,61.936 h2.1
  text "VN8" at 132.908,61.936 h2.1
  text "VN1" at 4.612,61.913 h2.1
  text "VN2" at 22.298,61.913 h2.1
  text "VN4" at 57.924,61.913 h2.1
  text "VN7" at 115.054,61.913 h2.1
  text "A" at 164.816,61.14 h2
  text "B" at 171.166,61.14 h2
  text "LED" at 166.467,29.136 h2
  text "LED" at 171.547,29.136 h2
  text "+48" at 182.616,28.377 h2.2
  text "-48" at 188.712,28.377 h2.2
  text "+48" at 193.792,28.377 h2.2
  text "-48" at 198.872,28.377 h2.2
  text "LP1" at -5.04,28.328 h2.1
  text "VP1" at 0.802,28.328 h2.1
  text "LN1" at 6.136,28.328 h2.1
  text "LP2" at 12.646,28.328 h2.1
  text "VP2" at 18.488,28.328 h2.1
  text "LN2" at 23.822,28.328 h2.1
  text "LP3" at 30.586,28.328 h2.1
  text "VP3" at 36.428,28.328 h2.1
  text "LN3" at 41.762,28.328 h2.1
  text "LP4" at 48.272,28.328 h2.1
  text "VP4" at 54.114,28.328 h2.1
  text "LN4" at 59.448,28.328 h2.1
  text "LP5" at 65.958,28.328 h2.1
  text "VP5" at 71.8,28.328 h2.1
  text "LN5" at 77.134,28.328 h2.1
  text "LP7" at 105.402,28.328 h2.1
  text "VP7" at 111.244,28.328 h2.1
  text "LN7" at 116.578,28.328 h2.1
  text "LP8" at 123.256,28.328 h2.1
  text "VP8" at 129.098,28.328 h2.1
  text "LN8" at 134.432,28.328 h2.1
  text "LP6" at 83.678,28.279 h2.1
  text "VP6" at 89.52,28.279 h2.1
  text "LN6" at 94.854,28.279 h2.1
  text "RX-" at 144.496,28.12 h2.5
  text "RX+" at 150.592,28.12 h2.5
  text "TX-" at 155.926,28.12 h2.5
  text "TX+" at 160.752,28.12 h2.5
  text "A" at 167.356,27.104 h2
  text "B" at 172.69,27.104 h2
  text "PWR 48-1" at 182.245,22.225 h2.1
  text "PWR 48-2" at 193.675,22.225 h2.1
  text "CH1" at -2.119,21.597 h4
  text "CH2" at 15.186,21.597 h4
  text "CH3" at 33.126,21.597 h4
  text "CH4" at 51.066,21.597 h4
  text "CH5" at 69.006,21.597 h4
  text "CH7" at 109.085,21.597 h4
  text "CH8" at 126.558,21.597 h4
  text "CH6" at 87.361,21.548 h4
  text "Ethernet 1" at 151.098,21.47 h4
Edge:
  circle w0.1: c-7.8,29.4 r5
  circle w0.1: c-7.8,69.4 r5
  circle w0.1: c24.2,0.1 r5
  circle w0.1: c24.2,98.7 r5
  circle w0.1: c64.2,0.1 r5
  circle w0.1: c138.2,0.1 r5
  circle w0.1: c178.2,0.1 r5
  circle w0.1: c178.2,98.7 r5
  circle w0.1: c210.2,29.4 r5
  circle w0.1: c210.2,69.4 r5
  circle w0.1: c-7.8,49.4 r5
  circle w0.1: c210.2,49.4 r5
  circle w0.1: c44.2,0.1 r5
  circle w0.1: c101.2,29.4 r5
  circle w0.1: c101.2,69.4 r5
  circle w0.1: c44.2,98.7 r5
  circle w0.1: c158.2,0.1 r5
  circle w0.1: c158.2,98.7 r5
  circle w0.1: c101.2,49.4 r5
Board:
  the board outline again, w0.5
Top Assy:
  circle w0.254: c124.992,36.48 r0.62
  circle w0.254: c130.072,36.48 r0.62
  circle w0.254: c135.152,36.48 r0.62
  circle w0.254: c134.552,55.72 r0.62
  circle w0.254: c129.472,55.72 r0.62
  circle w0.254: c89.92,55.671 r0.62
  circle w0.254: c95,55.671 r0.62
  circle w0.254: c95.6,36.431 r0.62
  circle w0.254: c90.52,36.431 r0.62
  circle w0.254: c85.44,36.431 r0.62
  circle w0.254: c111.692,55.72 r0.62
  circle w0.254: c116.772,55.72 r0.62
  circle w0.254: c117.372,36.48 r0.62
  circle w0.254: c112.292,36.48 r0.62
  circle w0.254: c107.212,36.48 r0.62
  circle w0.254: c72.14,55.72 r0.62
  circle w0.254: c77.22,55.72 r0.62
  circle w0.254: c77.82,36.48 r0.62
  circle w0.254: c72.74,36.48 r0.62
  circle w0.254: c67.66,36.48 r0.62
  circle w0.254: c54.36,55.72 r0.62
  circle w0.254: c59.44,55.72 r0.62
  circle w0.254: c60.04,36.48 r0.62
  circle w0.254: c54.96,36.48 r0.62
  circle w0.254: c49.88,36.48 r0.62
  circle w0.254: c36.58,55.72 r0.62
  circle w0.254: c41.66,55.72 r0.62
  circle w0.254: c42.26,36.48 r0.62
  circle w0.254: c37.18,36.48 r0.62
  circle w0.254: c32.1,36.48 r0.62
  circle w0.254: c18.8,55.72 r0.62
  circle w0.254: c23.88,55.72 r0.62
  circle w0.254: c24.48,36.48 r0.62
  circle w0.254: c19.4,36.48 r0.62
  circle w0.254: c14.32,36.48 r0.62
  circle w0.254: c145.984,55.72 r0.62
  circle w0.254: c151.064,55.72 r0.62
  circle w0.254: c156.144,55.72 r0.62
  circle w0.254: c161.224,55.72 r0.62
  circle w0.254: c166.304,55.72 r0.62
  circle w0.254: c171.384,55.72 r0.62
  circle w0.254: c189.276,36.48 r0.62
  circle w0.254: c184.196,36.48 r0.62
  circle w0.254: c172.004,36.48 r0.62
  circle w0.254: c146.604,36.48 r0.62
  circle w0.254: c166.924,36.48 r0.62
  circle w0.254: c161.844,36.48 r0.62
  circle w0.254: c156.764,36.48 r0.62
  circle w0.254: c151.684,36.48 r0.62
  circle w0.254: c202.5,98.6 r0.62
  circle w0.254: c211,17.1 r0.62
  circle w0.254: c202.5,0 r0.62
  circle w0.254: c0,0 r0.62
  circle w0.254: c-9,17.1 r0.62
  circle w0.254: c0,98.6 r0.62
  circle w0.254: c1.02,55.72 r0.62
  circle w0.254: c6.1,55.72 r0.62
  circle w0.254: c6.7,36.48 r0.62
  circle w0.254: c1.62,36.48 r0.62
  circle w0.254: c-3.46,36.48 r0.62

## Dimensions
207.5,-4.9 to 207.5,103.6 on Drill Drawing
-14,12.1 to 216.5,12.1 on Drill Drawing

## Text inside footprints (layer, text, board x,y; h text height)
Designator4: Top Assy "SN" at 125.463,93.82 h1.56; Top Overlay "SN" at 125.559,93.779 h3
Designator5: Top Assy "QC" at 101.243,93.82 h1.56; Top Overlay "QC" at 101.429,93.779 h3
Designator6: Bottom Assy "SN" at 82.107,68.11 h1.56; Bottom Overlay "SN" at 82.011,68.069 h3
XP1: Top Assy "2" at 15.727,86.288 h0.95 r180; Top Assy "1" at 15.563,83.748 h0.95 r180
XP2: Top Assy "2" at 91.915,86.288 h0.95 r180; Top Assy "1" at 91.752,83.748 h0.95 r180
XP3: Top Assy "2" at 168.063,86.429 h0.95 r180; Top Assy "1" at 168.063,83.889 h0.95 r180